# EAGLE board Power_Controller_2.0 (EAGLE 6.4)
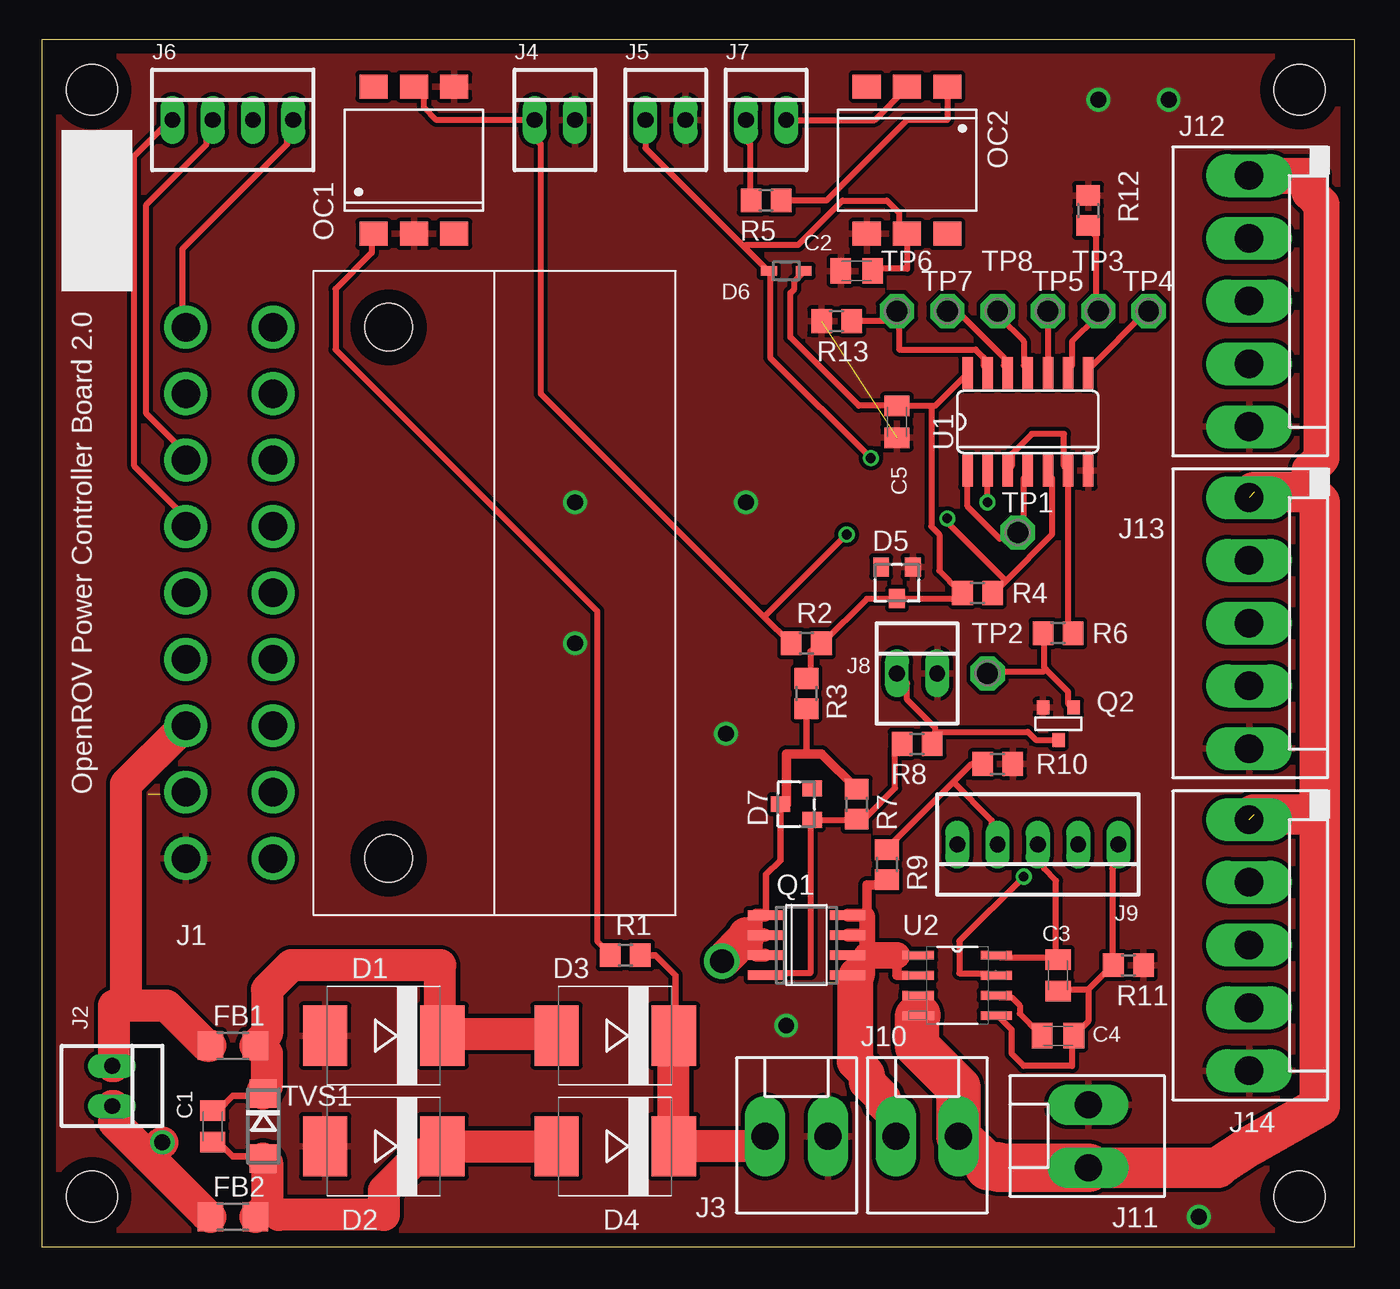
[diagram p0: board, top side]
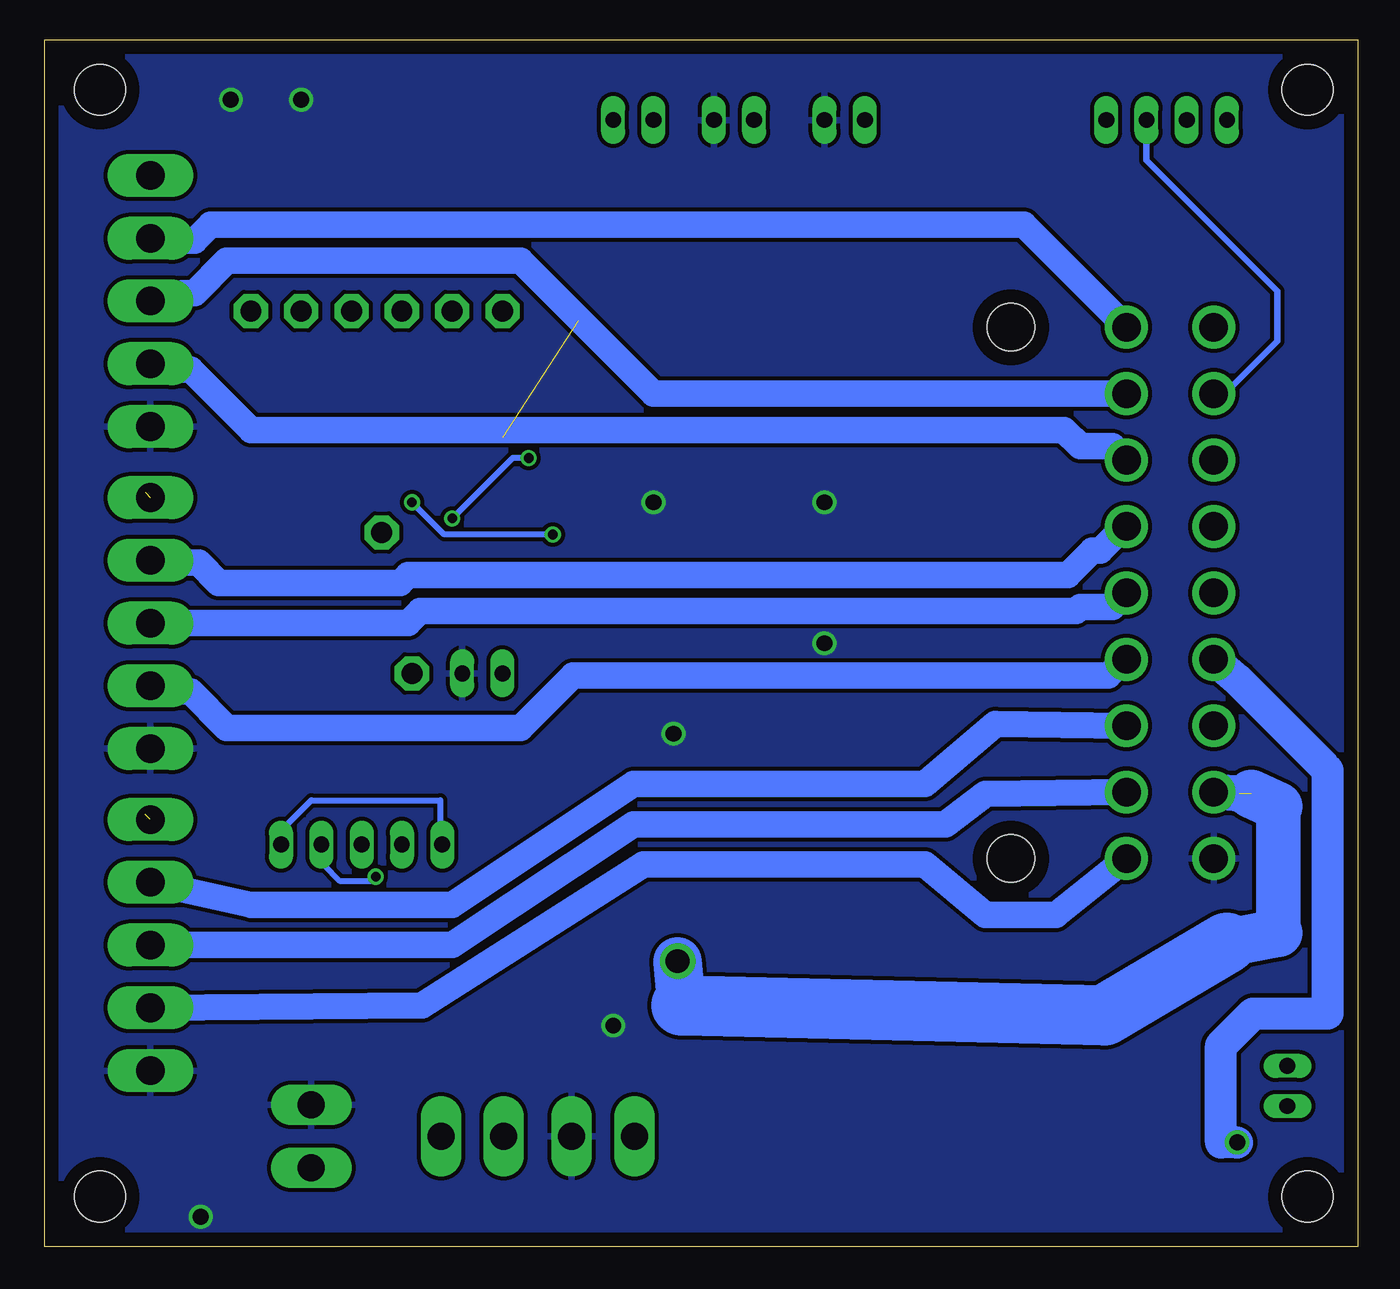
[diagram p1: board, bottom side, seen from below]

Size 82.86 x 76.19 mm. Coordinates in mm from the lower left corner, seen from the top.
Outline: 0,0 82.86,0 82.86,76.19 0,76.19 0,0
Copper layers (1*16): Top 0.035mm / dielectric 1.5mm / Bottom 0.035mm
Design rules "default *": minimum track width 10mil, minimum drill 24mil, track to track 8mil, track to pad 8mil, pad to pad 8mil, via to via 8mil, smd to smd 8mil, copper to edge 35mil, drill to drill 8mil, minimum pad ring 10mil, minimum via ring 8mil, stop-mask expansion 4mil, vias tented up to drill 0mil, thermal gap 10mil
Net classes: 0 default: width 0.381 mm, drill 0.508 mm, clearance 0.254 mm; 1 ESC: width 1.676 mm, drill 0.762 mm, clearance 0.381 mm to class 0, clearance 0.381 mm; 2 Power: width 2.286 mm, drill 1.016 mm, clearance 0.381 mm to class 0, clearance 0.381 mm to class 1, clearance 0.381 mm; 3 Tether: width 2.032 mm, drill 1.016 mm, clearance 0.508 mm to class 0, clearance 0.508 mm to class 1, clearance 0.508 mm to class 2, clearance 0.508 mm
Holes 3.2 mm at 3.17,3.17 3.17,73.03 79.38,73.03 79.38,3.17

## Footprints (pad centres in the part's own frame; a part is rotated, then mirrored left to right if it is on the bottom)
C0805K = smd 1.3 x 1.6: 1 -1,0; 2 1,0
SMC = smd 2.8 x 3.8: A 3.7,0; C -3.7,0
TO236 = smd 1 x 1.2: A -1,-1; C 0,1; NC 1,-1
SOD323 = smd 1 x 0.6: 1 -1.1,0; 2 1.1,0
R1206 = smd 1.6 x 1.803: 1 -1.422,0; 2 1.422,0
MINI-FIT-JR-18-PEGS = drill 1.803: 1 0,-16.764; 2 0,-12.573; 3 0,-8.382; 4 0,-4.191; 5 0,0; 6 0,4.191; 7 0,8.382; 8 0,12.573; 9 0,16.764; 10 5.512,-16.764; 11 5.512,-12.573; 12 5.512,-8.382; 13 5.512,-4.191; 14 5.512,0; 15 5.512,4.191; 16 5.512,8.382; 17 5.512,12.573; 18 5.512,16.764 | hole 2.997: -7.29,-16.764; -7.29,16.764
22-23-2021 = drill 1 long: 1 -1.27,0; 2 1.27,0
KK-156-2 = drill 1.7 pad 2.184 long: 1 -1.98,0; 2 1.98,0
22-23-2041 = drill 1 long: 1 -3.81,0; 2 -1.27,0; 3 1.27,0; 4 3.81,0
22-23-2051 = drill 1 long: 1 -5.08,0; 2 -2.54,0; 3 0,0; 4 2.54,0; 5 5.08,0
ESC-PADS = drill 1.803 pad 2.362 long: 1 -7.92,0; 2 -3.96,0; 3 0,0; 4 3.96,0; 5 7.92,0
DIL6-SMD = smd 1.78 x 1.52: 1 -2.54,-4.645; 2 0,-4.645; 3 2.54,-4.645; 4 2.54,4.645; 5 0,4.645; 6 -2.54,4.645
SO8 = smd 0.6 x 2.2: 1 -1.905,-2.6; 2 -0.635,-2.6; 3 0.635,-2.6; 4 1.905,-2.6; 5 1.905,2.6; 6 0.635,2.6; 7 -0.635,2.6; 8 -1.905,2.6
SOT-23 = smd 0.787 x 0.889: 1 0.025,-1.016; 2 -0.94,1.016; 3 0.991,1.016
R0805 = smd 1.3 x 1.5: 1 -0.95,0; 2 0.95,0
P1-13 = drill 1.321 pad 2.159 octagon: TP 0,0
DO214AC = smd 1.8 x 1.7: A 2.05,0; C -2.05,0
SO14 = smd 0.66 x 2.032: 1 -3.81,-3.073; 2 -2.54,-3.073; 3 -1.27,-3.073; 4 0,-3.073; 5 1.27,-3.073; 6 2.54,-3.073; 7 3.81,-3.073; 8 3.81,3.073; 9 2.54,3.073; 10 1.27,3.073; 11 0,3.073; 12 -1.27,3.073; 13 -2.54,3.073; 14 -3.81,3.073
SOIC127P600X175-8N = smd 1.981 x 0.559: 1 -2.464,1.905; 2 -2.464,0.635; 3 -2.464,-0.635; 4 -2.464,-1.905; 5 2.464,-1.905; 6 2.464,-0.635; 7 2.464,0.635; 8 2.464,1.905

## Placement (x,y rotation side)
C1  0.1 uF  [C0805K]  10.79,7.62 270 top
C2  0.1 uF  [C0805K]  51.44,61.59 180 top
C3  0.1 uF  [C0805K]  64.14,17.14 270 top
C4  0.1 uF  [C0805K]  64.14,13.34 0 top
C5  0.1 uF  [C0805K]  53.98,52.07 270 top
D1  B560  [SMC]  21.59,13.34 180 top
D2  B560  [SMC]  21.59,6.35 180 top
D3  B560  [SMC]  36.2,13.34 180 top
D4  B560  [SMC]  36.2,6.35 180 top
D5  BZX84B16  [TO236]  53.98,41.91 180 top
D6  SDM10K45  [SOD323]  46.99,61.59 180 top
D7  BZX84B16  [TO236]  47.62,27.94 90 top
FB1  HI1206T161R-10  [R1206]  12.06,12.7 0 top
FB2  HI1206T161R-10  [R1206]  12.06,1.91 0 top
J1  [MINI-FIT-JR-18-PEGS]  14.61,41.27 180 top
J2  [22-23-2021]  4.45,10.16 270 top
J3  [KK-156-2]  47.62,6.99 0 top
J4  [22-23-2021]  32.38,71.12 0 top
J5  [22-23-2021]  39.37,71.12 0 top
J6  22-23-2041  [22-23-2041]  12.06,71.12 0 top
J7  [22-23-2021]  45.72,71.12 0 top
J8  [22-23-2021]  55.24,36.2 0 top
J9  22-23-2051  [22-23-2051]  62.87,25.4 180 top
J10  [KK-156-2]  55.88,6.99 0 top
J11  [KK-156-2]  66.04,6.99 90 top
J12  [ESC-PADS]  76.2,59.69 270 top
J13  [ESC-PADS]  76.2,39.37 270 top
J14  [ESC-PADS]  76.2,19.05 270 top
OC1  4N33S  [DIL6-SMD]  23.5,68.58 0 top
OC2  4N33S  [DIL6-SMD]  54.61,68.58 180 top
Q1  SI4425DDY  [SO8]  48.26,19.05 270 top
Q2  2N7002  [SOT-23]  64.14,33.02 0 top
R1  10K  [R0805]  36.83,18.41 0 top
R2  27K  [R0805]  48.26,38.1 0 top
R3  1K  [R0805]  48.26,34.92 270 top
R4  27K  [R0805]  59.05,41.27 180 top
R5  3.9K  [R0805]  45.72,66.04 180 top
R6  0  [R0805]  64.14,38.73 180 top
R7  10K  [R0805]  51.44,27.94 270 top
R8  1K  [R0805]  55.24,31.75 180 top
R9  DNP  [R0805]  53.34,24.13 270 top
R10  DNP  [R0805]  60.33,30.48 180 top
R11  DNP  [R0805]  68.58,17.78 180 top
R12  0  [R0805]  66.04,65.41 270 top
R13  0  [R0805]  50.16,58.42 0 top
TP1  TPPAD1-13  [P1-13]  61.59,45.09 0 top
TP2  TPPAD1-13  [P1-13]  59.69,36.2 0 top
TP3  TPPAD1-13  [P1-13]  66.67,59.05 0 top
TP4  TPPAD1-13  [P1-13]  69.85,59.05 0 top
TP5  TPPAD1-13  [P1-13]  63.5,59.05 0 top
TP6  TPPAD1-13  [P1-13]  53.98,59.05 0 top
TP7  TPPAD1-13  [P1-13]  57.15,59.05 0 top
TP8  TPPAD1-13  [P1-13]  60.33,59.05 0 top
TVS1  SMAJ45CA  [DO214AC]  13.97,7.62 270 top
U1  CD4011BM  [SO14]  62.23,52.07 0 top
U2  ACS712ELCTR-20A-T  [SOIC127P600X175-8N]  57.78,16.51 0 top

## Library data of the parts
C1-C5 R1-R13 = rcl
D1-D5 D7 = diode
D6 FB1 FB2 TVS1 = Walts_Generic_Parts
J1 J12-J14 OC1 OC2 Q1 = OpenROV_Library
J2 J4 J5 J7 J8 = con-molex; MF: MOLEX; MPN: 22-23-2021; OC_FARNELL: 1462926; OC_NEWARK: 25C3832
J3 J10 J11 = con-molex; OC_FARNELL: unknown; OC_NEWARK: unknown
J6 = con-molex; MF: MOLEX; MPN: 22-23-2041; OC_FARNELL: 1462920; OC_NEWARK: 38C0355
J9 = con-molex; MF: MOLEX; MPN: 22-23-2051; OC_FARNELL: 1462952; OC_NEWARK: 38C9178
Q2 = zetex; OC_FARNELL: unknown; OC_NEWARK: unknown
TP1-TP8 = testpad
U1 = 40xx
U2 = OpenROV_Library; MPN: ACS712ELCTR-20A-T; OC_FARNELL: 1329624; OC_NEWARK: 31M3133; PACKAGE: SOIC-8; SUPPLIER: Allegro

## Nets
1A [ESC]: J1.1 J12.2
1B [ESC]: J1.2 J12.3
1C [ESC]: J1.3 J12.4
2A [ESC]: J1.4 J13.2
2B [ESC]: J1.5 J13.3
2C [ESC]: J1.6 J13.4
3A [ESC]: J1.7 J14.2
3B [ESC]: J1.8 J14.3
3C [ESC]: J1.9 J14.4
BATTERY+ [Power]: D7.C J1.17 Q1.1 Q1.2 Q1.3 R3.2 R7.1
GND: C2.2 C5.2 D1.A D2.A D5.A J1.18 J3.2 J4.2 J5.2 J8.2 J11.2 J12.5 J13.5 J14.5 OC1.2 OC1.4 OC2.4 Q2.2 R10.1 R11.1 R12.1 R13.1 U1.7
I2C_GND: J1.10 J6.4
I2C_SCL: J1.12 J6.2
I2C_SDA: J1.11 J6.3
I2C_VCC: J1.13 J6.1
N$1: R6.1 U1.3 U1.6
N$2: OC2.1 R5.1
N$3: R12.2 TP3.TP U1.9
N$4: R13.2 TP6.TP U1.13
N$5: TP5.TP U1.10
N$6: TP8.TP U1.11
N$7: D7.A Q1.4 R7.2 R8.2
N$8: Q2.3 R6.2 TP2.TP
N$9: J7.2 OC2.2
N$10: TP4.TP U1.8
N$12: J8.1 Q2.1 R8.1
N$13: TP7.TP U1.12
N$14 [Power]: J10.1 Q1.5 Q1.6 Q1.7 Q1.8 R9.2 U2.1 U2.2
N$15 [Tether]: C1.1 D1.C D3.A FB1.2 TVS1.C
N$16 [Tether]: C1.2 D2.C D4.A FB2.2 TVS1.A
N$17: OC1.1 R1.1
N$18: J9.4 R9.1 R10.2
N$19: C3.1 J9.3 U2.8
N$20: C4.1 U2.6
N$21: C3.2 C4.2 J9.1 J9.5 R11.2 U2.5
N$23: J9.2 U2.7
POWER_OFF*: C2.1 D6.2 J5.1 OC2.5 R4.1 U1.5
POWER_ON*: J4.1 OC1.5 R2.1 U1.2
POWER_SWITCH*: TP1.TP U1.1 U1.4
SOFT_POWER_OFF: J7.1 R5.2
SPARE: J1.14
TETHER_A [Tether]: FB1.1 J1.16 J2.1
TETHER_B [Tether]: FB2.1 J1.15 J2.2
TETHER_POWER [Tether]: D3.C D4.C J3.1 R1.2
U1_POWER: C5.1 D5.C D6.1 R2.2 R3.1 R4.2 U1.14
V_BAT_SWITCHED [Power]: J10.2 J11.1 J12.1 J13.1 J14.1 U2.3 U2.4

## Tracks (layer width: path | path; a pad name or v marks a point on that pad's centre or on a via)
1A
  Bottom 1.676: J1.1 21.08,64.52 72.39,64.52 73.41,63.5 76.2,63.5 J12.2
1B
  Bottom 1.676: J1.2 44.45,53.85 52.83,62.23 71.37,62.23 73.41,60.2 74.17,60.2 74.68,59.69 J12.3
1C
  Bottom 1.676: J1.3 15.49,50.55 17.53,50.55 18.54,51.56 69.85,51.56 73.66,55.37 74.17,55.37 74.42,55.63 76.2,55.63 J12.4
2A
  Bottom 1.676: J1.4 14.73,45.47 16.26,43.94 16.76,43.94 18.29,42.42 59.94,42.42 60.45,41.91 71.88,41.91 73.15,43.18 76.2,43.18 J13.2
2B
  Bottom 1.676: J1.5 15.49,40.39 17.53,40.39 17.78,40.13 59.18,40.13 59.94,39.37 J13.3
2C
  Bottom 1.676: J1.6 14.73,37.08 15.75,36.07 49.53,36.07 52.83,32.77 71.37,32.77 73.66,35.05 74.17,35.05 74.42,35.31 76.2,35.31 J13.4
3A
  Bottom 1.676: J14.2 69.85,21.59 57.15,21.59 45.72,29.21 27.3,29.21 22.86,33.02 J1.7
3B
  Bottom 1.676: J14.3 57.15,19.05 45.72,26.67 26.04,26.67 23.5,28.57 J1.8
3C
  Bottom 1.676: J14.4 59.05,15.24 45.09,24.13 27.3,24.13 23.5,20.95 19.05,20.95 J1.9
BATTERY+  (via drill 1.5)  (1 unrouted)
  Top 0.406: 45.09,18.41 44.45,18.41 | 45.09,19.68 44.45,19.68 | R3.2 48.26,31.11 | D7.C 46.62,24.4 45.72,23.5 45.72,21.02 Q1.1
  Top 0.61: D7.C 46.99,27.94 46.99,31.11 48.26,31.11 49.21,31.11 R7.1
  Top 0.813: Q1.3 45.09,18.41 45.09,19.68 | Q1.2 45.09,19.68 | Q1.1 45.09,20.95 45.09,19.68
  Top 2.286: v42.93,18.03 44.45,19.56 44.45,19.68
  Bottom 2.286: 7.49,28.57 8.89,28.7 J1.17
  Bottom 2.794: 5.02,19.81 5.02,27.81
  Bottom 3.048: 5.02,27.81 6.73,28.57 | 8.26,19.18 5.02,19.81 | v42.93,18.03 42.67,15.24
  Bottom 3.81: 8.26,19.18 16,14.61 42.67,15.24
GND  (via drill 1)  (1 unrouted)
  other vias: 33.66,46.99 44.45,46.99 33.66,38.1 66.67,72.39 71.12,72.39 73.03,1.91 46.99,13.97 43.18,32.38
  pour Top: -0.64,76.83 83.19,76.83 83.19,-0.64 -0.64,-0.64
  pour Bottom: -0.64,-0.64 83.19,-0.64 83.19,76.83 -0.64,76.83 -0.64,76.2
I2C_GND
  Top 0.381: J6.4 15.75,71.12 15.49,70.87 15.49,69.6 8.89,62.99 8.89,58.17 J1.10
I2C_SCL
  Top 0.381: J6.2 10.67,71.12 10.41,70.87 10.41,69.6 6.6,65.79 6.6,52.58 8.89,50.29 8.89,49.78 J1.12
I2C_SDA
  Bottom 0.406: J1.11 8.38,53.85 5.08,57.15 5.08,60.33 13.34,68.58 J6.3
I2C_VCC
  Top 0.381: J6.1 8.13,71.12 5.84,68.83 5.84,49.28 8.89,46.23 8.89,45.47 J1.13
N$1
  Top 0.381: R6.1 65.02,38.86 64.77,39.12 U1.6 64.77,49.02 64.52,49.28 64.52,51.31 62.48,51.31 61.21,50.04 61.21,49.28 60.96,49.02 U1.3
N$2
  Top 0.381: R5.1 49.53,66.04 54.61,71.12 57.15,71.12 OC2.1
N$3
  Top 0.381: R12.2 66.04,64.26 66.55,63.75 66.55,59.18 TP3.TP 66.55,58.93 66.55,58.67 65.02,57.15 65.02,55.63 64.77,55.37 U1.9
N$4
  Top 0.381: R13.2 53.85,58.42 53.85,58.93 TP6.TP 54.1,58.93 54.1,56.64 58.93,56.64 59.44,56.13 59.44,55.63 59.69,55.37 U1.13
N$5
  Top 0.381: TP5.TP U1.10
N$6
  Top 0.381: U1.11 62.23,55.37 61.98,55.63 61.98,57.15 60.45,58.67 60.45,58.93 TP8.TP
N$7
  Top 0.381: R8.2 54.1,31.75 53.85,31.5 53.85,28.96 52.07,27.18 51.56,27.18 R7.2 51.31,26.92 48.77,26.92 D7.A 48.51,26.92 48.51,17.27 45.72,17.27 Q1.4
N$8
  Top 0.381: 63.37,36.45 63.25,36.58 63.25,38.61 R6.2 | 63.37,36.45 64.77,35.05 64.77,34.29 65.02,34.04 Q2.3 | 63.37,36.45 63.25,36.32 59.69,36.32 TP2.TP
N$9
  Top 0.381: J7.2 52.58,71.12 54.61,73.15 OC2.2
N$10
  Top 0.381: U1.8 66.04,55.37 69.85,59.18 TP4.TP
N$12
  Top 0.381: Q2.1 62.74,32 62.23,32.51 56.39,32.51 | 56.39,32.51 56.39,31.75 R8.1 | J8.1 54.61,35.56 54.61,34.54 56.39,32.77 56.39,32.51
N$13
  Top 0.381: U1.12 60.96,55.37 60.71,55.63 60.71,56.13 57.91,58.93 57.15,58.93 TP7.TP
N$14
  Top 0.406: Q1.8 51.44,20.95 | Q1.5 51.44,17.14
  Top 0.61: U2.1 53.98,18.41 53.98,17.14 U2.2 | 51.44,20.95 52.07,20.95 52.07,22.86 53.34,22.86 R9.2 | 52.07,18.41 Q1.6
  Top 0.813: 52.07,17.14 51.44,17.14 | Q1.8 52.07,20.95 | Q1.7 52.07,19.68
  Top 1.016: 52.07,20.95 52.07,19.68 52.07,18.41 52.07,17.14
  Top 1.676: 52.07,18.41 53.98,18.41
  Top 2.286: J10.1 53.85,7.11 53.85,8.38 53.09,9.14 53.09,9.4 52.07,10.41 52.07,10.92 51.31,11.68 51.31,16.76 51.44,17.14
N$15
  Top 0.406: C1.1 11.16,8.62 12.06,9.53 13.82,9.53 TVS1.C
  Top 2.032: TVS1.C 13.97,9.91 14.22,10.16 14.22,12.19 13.72,12.7 FB1.2 14.22,13.46 14.22,16.26 15.75,17.78 25.15,17.78 25.15,13.46 D1.C 26.16,13.46 32.26,13.46 D3.A
N$16
  Top 0.406: C1.2 11.16,6.62 12.06,5.71 13.82,5.71 TVS1.A
  Top 2.032: 14.22,2.54 13.72,2.03 FB2.2 | 14.22,2.54 14.22,5.33 13.97,5.59 TVS1.A | 14.22,2.54 14.99,2.03 21.59,2.03 21.59,3.56 23.88,5.84 25.15,5.84 25.15,6.35 D2.C D4.A
N$17
  Top 0.381: R1.1 35.81,18.54 35.05,19.3 35.05,40.13 18.54,56.64 18.54,60.45 20.83,62.74 20.83,63.75 OC1.1
N$18
  Top 0.381: 57.53,29.34 58.67,30.48 R10.2 | 57.53,29.34 53.34,25.15 R9.1 | 57.53,29.34 59.94,26.92 59.94,25.65 60.2,25.4 J9.4
N$19
  Top 0.381: 64.01,18.29 60.45,18.29 U2.8 | 64.01,18.29 64.01,23.11 63.25,23.88 63.25,25.15 62.99,25.4 J9.3 | 64.01,18.29 C3.1
N$20
  Top 0.381: C4.1 62.99,13.46 61.72,14.73 61.72,15.24 61.21,15.75 60.45,15.75 U2.6
N$21
  Top 0.381: 66.04,16.26 67.56,17.78 | 66.04,16.26 64.26,16.26 C3.2 | 66.04,16.26 66.04,14.22 65.28,13.46 C4.2 65.02,13.21 65.02,11.43 61.98,11.43 61.21,12.19 61.21,13.72 60.45,14.48 U2.5 | 67.56,17.78 67.56,23.88 67.82,24.13 67.82,25.4 J9.1 | 67.56,17.78 R11.2
  Bottom 0.381: J9.5 57.91,25.4 57.91,28.19 66.04,28.19 67.82,26.42 67.82,25.4 J9.1
N$23  (via drill 0.61)
  Top 0.381: v61.98,23.37 57.91,19.3 57.91,17.27 60.2,17.27 U2.7
  Bottom 0.381: v61.98,23.37 62.23,23.11 64.26,23.11 65.28,24.13 65.28,25.4 J9.2
POWER_OFF*  (via drill 0.61)
  Top 0.381: 60.83,42.04 63.75,44.96 63.75,48.51 63.5,48.77 U1.5 | 60.83,42.04 60.2,41.4 R4.1 | C2.1 52.58,61.72 54.61,61.72 OC2.5 54.61,64.01 54.1,64.52 54.1,65.28 53.34,66.04 50.55,66.04 47.75,63.25 44.45,63.25 44.32,63.12 | 44.32,63.12 38.1,69.34 J5.1 | 44.32,63.12 45.72,61.72 D6.2 45.97,61.47 45.97,56.13 v52.32,49.78 | 60.83,42.04 57.15,45.72 v57.15,45.97
  Bottom 0.381: v57.15,45.97 53.34,49.78 v52.32,49.78
POWER_ON*  (via drill 0.61)
  Top 0.381: 45.59,39.75 31.5,53.85 31.5,69.6 31.24,69.85 31.24,71.12 J4.1 24.89,71.12 24.13,71.88 24.13,72.64 23.62,73.15 OC1.5 | 45.59,39.75 47.24,38.1 R2.1 | v59.69,46.99 U1.2 | 45.59,39.75 v50.8,44.96
  Bottom 0.381: v59.69,46.99 57.66,44.96 v50.8,44.96
POWER_SWITCH*
  Top 0.381: U1.1 58.42,46.74 60.45,44.7 61.47,44.7 61.47,44.96 TP1.TP 61.98,45.47 61.98,48.51 62.23,48.77 U1.4
SOFT_POWER_OFF
  Top 0.381: J7.1 44.45,69.85 44.7,69.6 44.7,66.04 R5.2
TETHER_A
  Top 2.032: 5.33,15.24 4.57,15.24 4.57,11.43 J2.1 | 5.33,15.24 7.87,15.24 10.41,12.7 FB1.1 | 5.33,15.24 5.33,29.21 8.89,32.77 J1.16
TETHER_B  (via drill 1.02)
  Top 2.032: 6.73,5.71 4.57,7.87 4.57,8.89 J2.2 | 6.73,5.71 10.41,2.03 FB2.1 | v7.62,6.6 6.73,5.71
  Bottom 1.93: 1.91,30.1 2.1,30.29
  Bottom 2.032: 2.1,30.29 7.62,35.81 J1.15 | 1.91,30.1 1.91,14.73 6.6,14.73 8.64,12.7 8.64,6.6 v7.62,6.6
TETHER_POWER
  Top 0.406: D3.C 40.01,13.34 40.01,17.14 38.73,18.41 R1.2
  Top 2.032: J3.1 45.47,6.86 45.47,6.35 D4.C 39.88,7.11 39.88,13.21 D3.C
U1_POWER
  Top 0.381: R3.1 48.26,36.07 48.51,36.32 48.51,37.59 49.02,38.1 R2.2 49.28,38.1 52.07,40.89 53.85,40.89 D5.C 54.1,40.89 57.91,40.89 57.91,41.15 R4.2 57.91,41.4 56.64,42.67 56.64,44.96 56.13,45.47 56.13,53.09 | D6.1 48.01,61.47 47.5,60.96 47.5,60.45 47.24,60.2 47.24,57.4 51.56,53.09 53.85,53.09 C5.1 54.1,53.09 56.13,53.09 | 56.13,53.09 56.39,53.09 58.42,55.12 U1.14
V_BAT_SWITCHED  (2 unrouted)
  Top 0.61: U2.4 54.61,14.61 54.61,15.88 U2.3
  Top 2.286: J12.1 76.2,67.56 80.01,67.56 80.01,66.55 80.77,65.79 80.77,49.78 80.01,49.02 80.01,47.62
  Top 2.54: J11.1 74.22,5 74.3,5.08 76.2,6.35 80.64,8.89 80.64,26.67 | 76.53,27.3 80.01,27.3 80.64,26.67 | 80.64,26.67 80.64,46.99 80.01,47.62 76.53,47.62
  Top 2.794: 59.77,5.08 J10.2 57.86,10.09 55.24,12.7 55.24,14.53 U2.4
  Top 3.048: J11.1 60.4,5 60.33,5.08 59.77,5.08

## Text on the board
tPlace: OpenROV Power Controller Board 2.0